# Altium PCB Relay schematic.PcbDoc
Units mil, origin at the board's own origin, x right, y up, seen from the top; angles counter-clockwise.
Board outline 5000 x 4000 mil, 2 copper layers (Top Layer, Bottom Layer); 16 components, 4 nets, 48 pads, 0 vias.
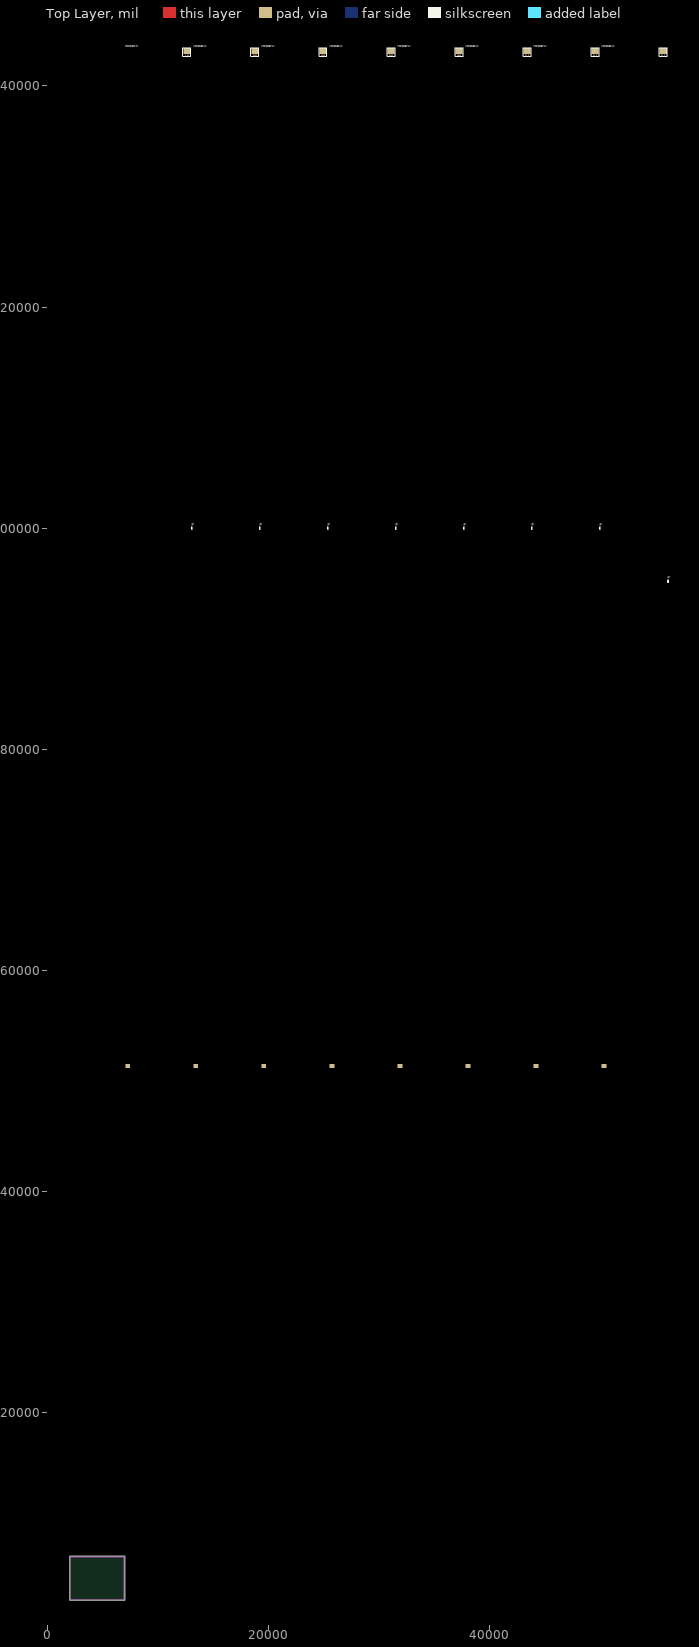
[diagram p0: Top Layer view]
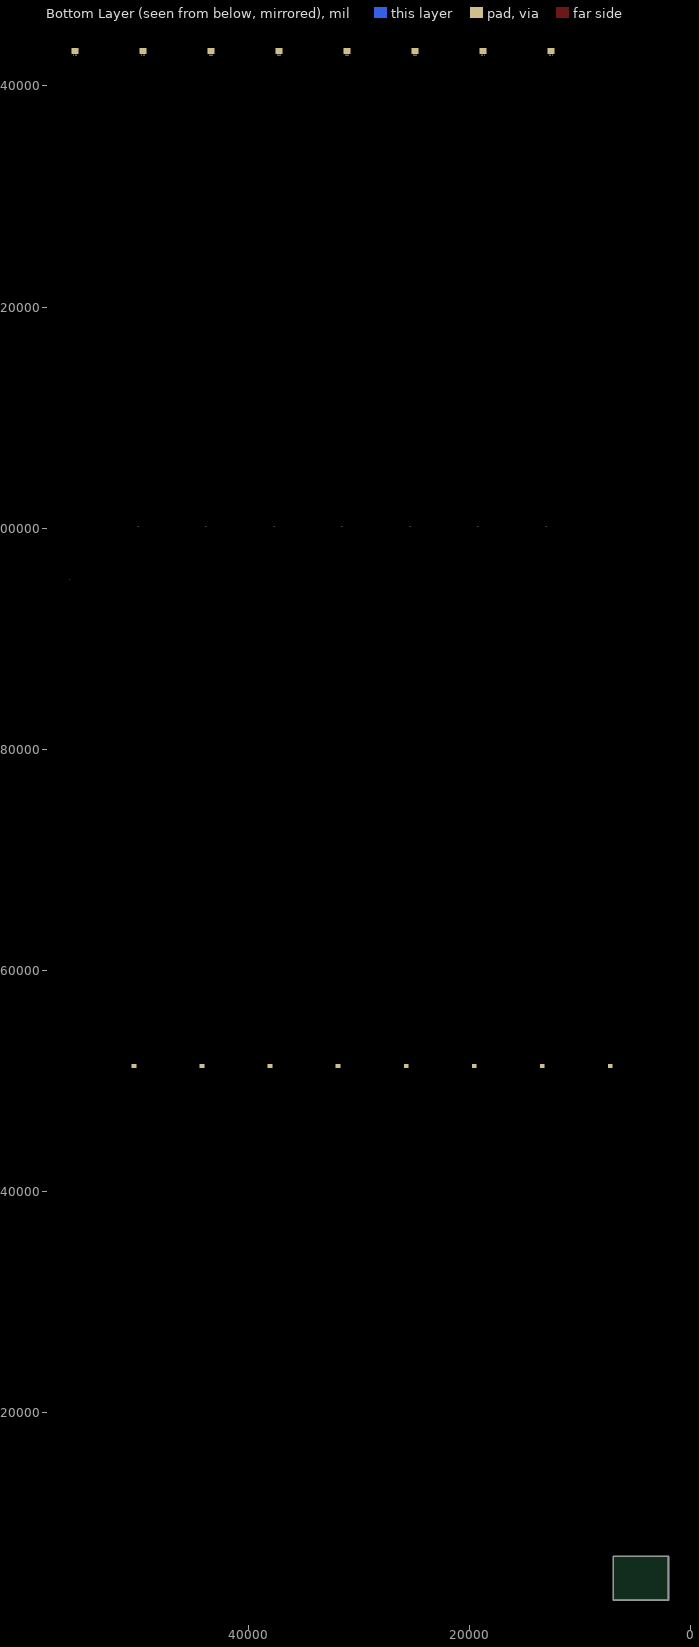
[diagram p1: Bottom Layer view, seen from below]

## Layer stack, top to bottom
Top Solder: solder mask 0.4, Solder Resist, Dk 3.5
Top Layer: signal copper 1.4
Dielectric 1: dielectric 12.6, FR-4, Dk 4.8
Bottom Layer: signal copper 1.4
Bottom Solder: solder mask 0.4, Solder Resist, Dk 3.5

## Board outline
2000,3000 7000,3000 7000,7000 2000,7000

## Design rules (kind name [scope] priority, off if disabled: settings)
Clearance [All] p1: gap=8
PolygonConnect [All] p1: connectstyle=Relief reliefconductorwidth=10 reliefentries=4 polygonreliefangle="90 Angle" airgapwidth=10
RoomDefinition "Relay schematic" [InComponentClass('Relay schematic')] p1: confinementstyle=ConfineIn formatcopy=TRUE lockcomponents=FALSE outline 7045,51150 56250,51150 56250,99999 7045,99999
RoutingVias [All] p1: holewidth=25 width=40 viastyle="Through Hole" minholewidth=28 minwidth=50 maxholewidth=28 maxwidth=50
SolderMaskExpansion [All] p1: expansion=4
UnpouredPolygon [All] p1: allowunpoured=FALSE
Width [All] p1: maxlimit=8 minlimit=8 preferedwidth=8
29 further rules are at their usual default settings.

## Classes and differential pairs
component class "Relay schematic": MOSFET-N R?

## Components (designator, comment, footprint, x,y, rotation, side; value= is the part's Value field where it differs from the comment)
MOSFET-N "" D2pakMOSFET 55810,99999 r0 top
MOSFET-N "" D2pakMOSFET 98895,99999 r0 top
MOSFET-N "" D2pakMOSFET 92740,99999 r0 top
MOSFET-N "" D2pakMOSFET 86585,99999 r0 top
MOSFET-N "" D2pakMOSFET 61965,99999 r0 top
MOSFET-N "" D2pakMOSFET 74275,99999 r0 top
MOSFET-N "" D2pakMOSFET 68120,99999 r0 top
MOSFET-N "" D2pakMOSFET 80430,99999 r0 top
R? "PR01000101001JR500" AXIAL-0.3 13070,99999 r90 top
R? "PR01000101001JR500" AXIAL-0.3 19225,99999 r90 top
R? "PR01000101001JR500" AXIAL-0.3 25380,99999 r90 top
R? "PR01000101001JR500" AXIAL-0.3 31535,99999 r90 top
R? "PR01000101001JR500" AXIAL-0.3 37690,99999 r90 top
R? "PR01000101001JR500" AXIAL-0.3 43845,99999 r90 top
R? "PR01000101001JR500" AXIAL-0.3 50000,99999 r90 top
R? "PR01000101001JR500" AXIAL-0.3 56155,95205 r90 top

## Footprints (in the part's own frame and the unit in brackets; to place one, negate y for a bottom-side part, rotate by r counter-clockwise, add the part's x,y. Pads: shape width x height; smd on the part's side, far side on the other; paste and mask are expansions set on the pad)
AXIAL-0.3 [mm] "Axial Device, Thru-Hole; 2 Leads; 0.3 in Pin Spacing"
  round 1.4 hole 0.85: 1(-3.81,0) 2(3.81,0)
  silkscreen extent -2.77,-0.76 2.77,0.76
D2pakMOSFET [mil]
  rect 430x380 all layers, no hole: 0(-48540,-48650)
  rect 57x125 all layers, no hole: 1(-43290,42765) 1(-43095,42765)
  rect 640x560 all layers, no hole: 9(-43190,43160)
  Top Layer lines w10: -43405,43315 -43385,43315 ; -43395,43305 -43395,43325
  silkscreen extent -43550,42700 -42830,43475

## Part data
MOSFET-N MOSFET-N MOSFET-N MOSFET-N MOSFET-N MOSFET-N MOSFET-N MOSFET-N: library part MOSFET-N, "N-Channel MOSFET"
R? R? R? R? R? R? R? R?: library part Res1, "Resistor"

## Nets (pads, with @x,y where several pads share a name; then routed paths per layer and width w, separated by ;. In a path a pad name is that pad's centre, name@x,y a point inside that pad or via, vN(x,y) a via of type N, cw(c..) or ccw(c..) an arc to the next point about the centre after c; other vN are vias at no path point)
NetMOSFET-N_1: MOSFET-N.1@12520,142764 MOSFET-N.1@12715,142764
NetMOSFET-N_2: R?.2@56155,95355
NetMOSFET-N_3: 
NetR?_1: R?.1@43845,99849
pads on no net: MOSFET-N.0 MOSFET-N.1@18675,142764 MOSFET-N.1@18870,142764 MOSFET-N.1@24830,142764 MOSFET-N.1@25025,142764 MOSFET-N.1@30985,142764 MOSFET-N.1@31180,142764 MOSFET-N.1@37140,142764 MOSFET-N.1@37335,142764 MOSFET-N.1@43295,142764 MOSFET-N.1@43490,142764 MOSFET-N.1@49450,142764 MOSFET-N.1@49645,142764 MOSFET-N.1@55605,142764 MOSFET-N.1@55800,142764 MOSFET-N.9 R?.1@13070,99849 R?.1@19225,99849 R?.1@25380,99849 R?.1@31535,99849 R?.1@37690,99849 R?.1@50000,99849 R?.1@56155,95055 R?.2@13070,100149 R?.2@19225,100149 R?.2@25380,100149 R?.2@31535,100149 R?.2@37690,100149 R?.2@43845,100149 R?.2@50000,100149

## Keep-outs
Keep-Out Layer:
  lines w10: 2050,3050 6950,3050 6950,6950 2050,6950 2050,3050

## Silkscreen, mask and mechanical layers (free items; w line width, h text height)
Drill Drawing:
  text ".LEGEND" at 7200,3200 h60
  text "Drill Drawing." at 7200,3100 h60

## Dimensions
2050,3050 to 6950,3050 on Mechanical 1
2050,3050 to 2050,6950 on Mechanical 1